# Altium PCB pipe_corner_pcb.PcbDoc
Units mm, origin at the board's own origin, x right, y up, seen from the top; angles counter-clockwise.
Board outline 27.9 x 27.15 mm, 2 copper layers (Top Layer, Bottom Layer); 6 components, 7 nets, 24 pads, 0 vias.
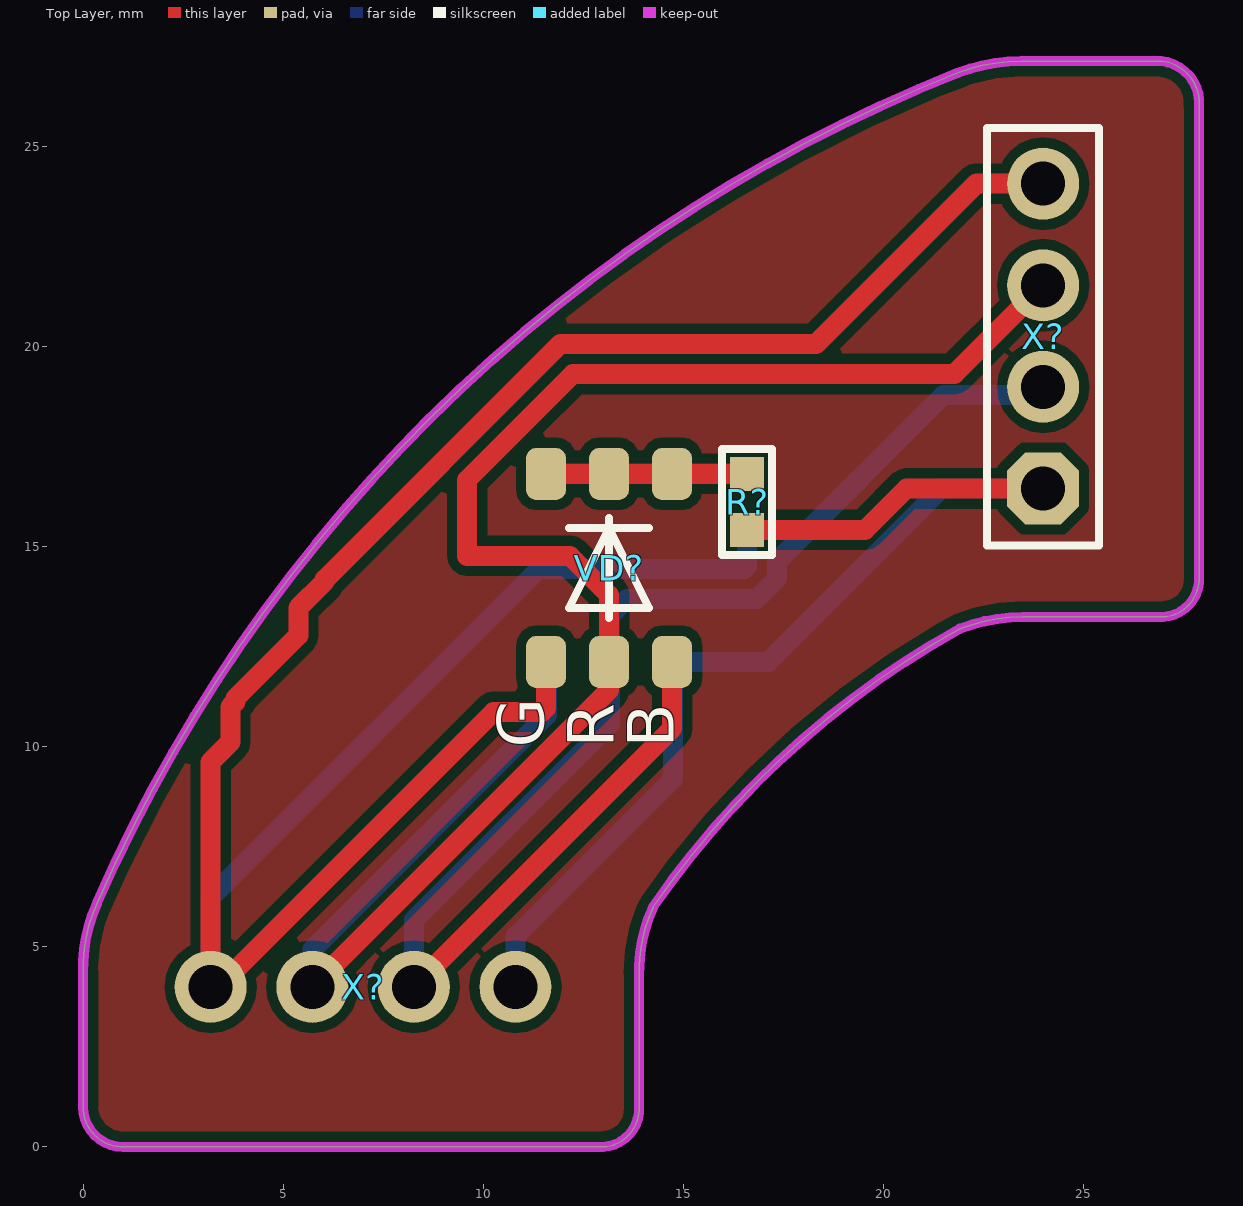
[diagram p0: Top Layer view]
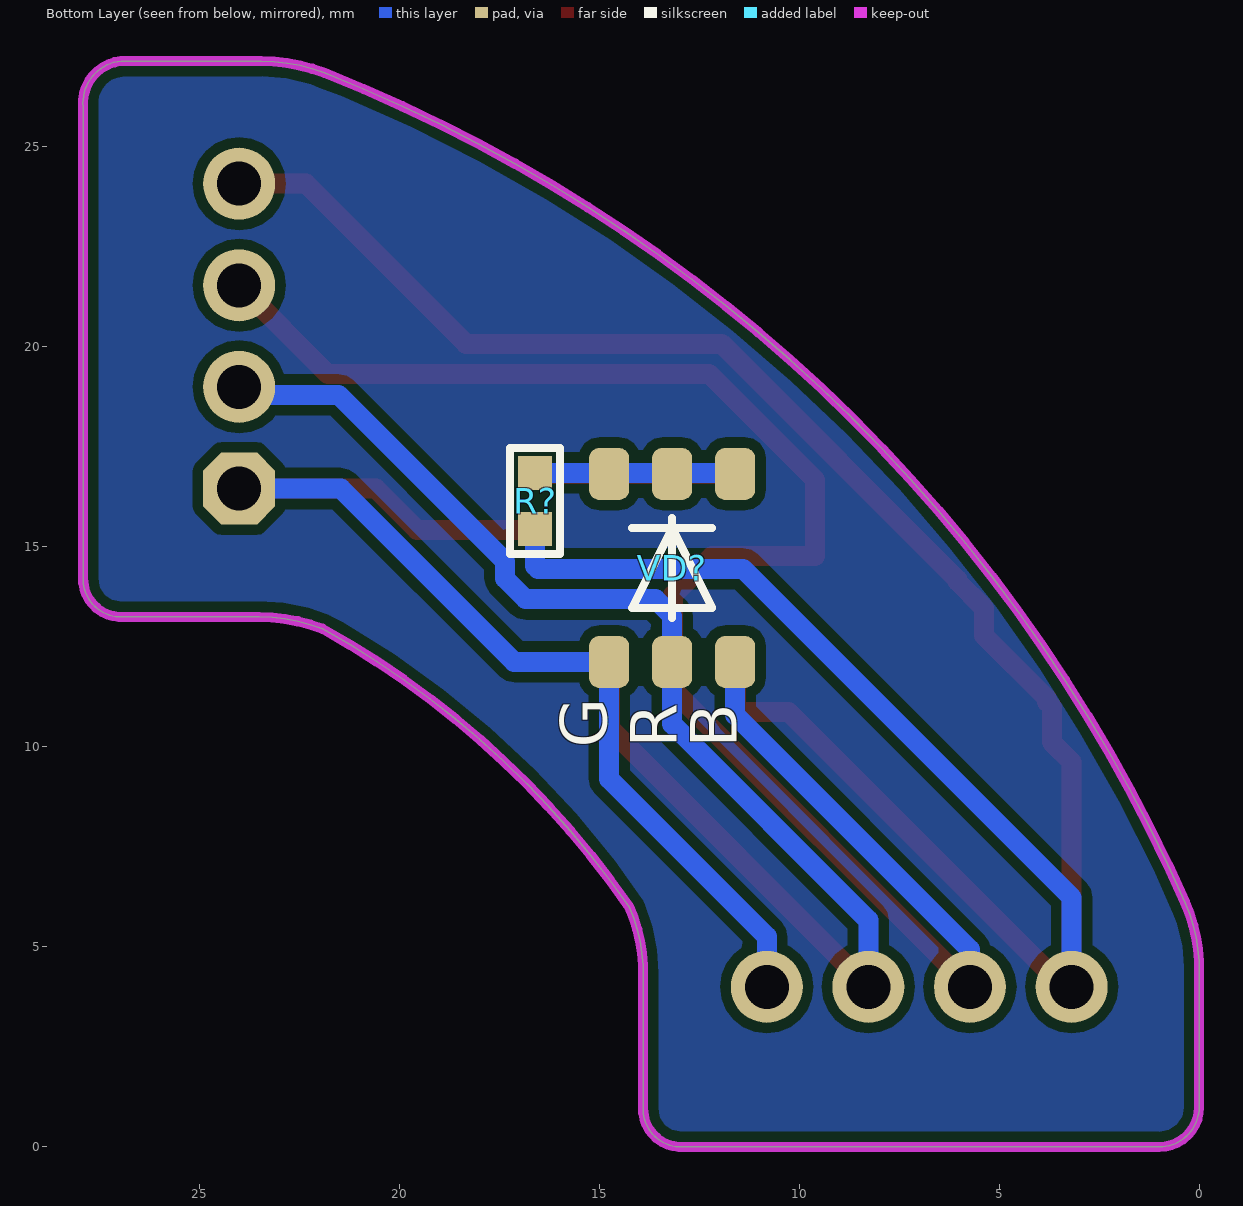
[diagram p1: Bottom Layer view, seen from below]

## Layer stack, top to bottom
Top Solder: solder mask 0.0102, Solder Resist, Dk 3.5
Top Layer: signal copper 0.0356
Dielectric 1: dielectric 0.32, FR-4, Dk 4.8
Bottom Layer: signal copper 0.0356
Bottom Solder: solder mask 0.0102, Solder Resist, Dk 3.5

## Board outline
0,1 ccw(c1,1) 1,0 13,0 ccw(c12.95,0.95) 13.9,1 13.9,4.25 cw(c17.95,4.35) 14.25,6 cw(c32.99,-6.958) 21.917,12.954 cw(c23.514,8.792) 23.5,13.25 27,13.25 ccw(c26.95,14.2) 27.9,14.25 27.9,26 ccw(c26.852,26.098) 26.95,27.147 23.45,27.147 ccw(c23.464,22.689) 21.867,26.851 ccw(c36.368,-9.717) 0.35,6.1 ccw(c4.05,4.45) 0,4.35

## Design rules (kind name [scope] priority, off if disabled: settings)
Clearance [All] p1: gap=0.254 ignorepadtopadclearanceinfootprint=FALSE except(0: Arc-Hole Track-Hole SMDPad-Hole THPad-Hole Via-Hole Fill-Hole Poly-Hole Region-Hole Text-Hole)
PolygonConnect [All] p1: connectstyle=Relief reliefconductorwidth=0.254 reliefentries=4 polygonreliefangle="90 Angle" airgapwidth=0.254
RoutingVias [All] p1: holewidth=0.711 width=1.27 viastyle="Through Hole" minholewidth=0.711 minwidth=1.27 maxholewidth=0.711 maxwidth=1.27
SolderMaskExpansion [All] p1: expansion=0.102
Width [All] p1: maxlimit=2 minlimit=0.254 preferedwidth=0.5
30 further rules are at their usual default settings.

## Classes and differential pairs
component class pipe_corner_schematic: J1 R? VD? X?

## Components (designator, comment, footprint, x,y, rotation, side; value= is the part's Value field where it differs from the comment)
R? "Resistor film, 100R, ±5%, 0603, 0.1W, -55...+125°C" "RES: 0603" 16.6,16.15 r270 bottom value=100R
R? "Resistor film, 100R, ±5%, 0603, 0.1W, -55...+125°C" "RES: 0603" 16.6,16.125 r270 top value=100R
VD? "VD?" RGB 13.15,14.475 r90 top
VD? "VD?" RGB 13.175,14.475 r90 bottom
X? "Connector, 4pin, 2.54mm, 500VAC, 3A" "CON: PBS-4 R" 24,20.27 r90 top
X? "Connector, 4pin, 2.54mm, 500VAC, 3A" "4PLS RIGHT ANGLE 2" 7,4 r180 top

## Footprints (in the part's own frame and the unit in brackets; to place one, negate y for a bottom-side part, rotate by r counter-clockwise, add the part's x,y. Pads: shape width x height; smd on the part's side, far side on the other; paste and mask are expansions set on the pad)
"4PLS RIGHT ANGLE 2" [mm]
  round 1.8 hole 1.1: 1(-3.81,0) 2(-1.27,0) 3(1.27,0) 4(3.81,0)
  body extent -5.04,-0.32 5.14,10.04, height 2.57
"CON: PBS-4 R" [mm] "PBS-5"
  oct 1.8x1.8 hole 1.1: 1(-3.81,0)
  round 1.8 hole 1.1: 2(-1.27,0) 3(1.27,0) 4(3.81,0)
  silkscreen extent -5.23,-1.4 5.2,1.4, body extent -5.08,-10.2 5.08,0, height 2.54
"RES: 0603" [mm]
  rect 0.85x0.85 smd: 1(-0.7,0) 2(0.7,0)
  silkscreen extent -1.33,-0.63 1.33,0.63, body extent -0.8,-0.4 0.8,0.4, height 0.44
RGB [mm]
  rrect50% 1.3x1 smd: 1(2.35,1.575) 2(2.35,0) 3(2.35,-1.575) 4(-2.35,1.575) 5(-2.35,0) 6(-2.35,-1.575)
  silkscreen extent -1.25,-1 1.25,1, body extent -1.8,-1.75 1.8,1.75, height 2.01

## Part data
R? R?: library part Resistor_0603, Manufacturer=Yageo, Package=0603, PartNumber=RC0603JR-07100RL, Power=0.1W, Temperature=-55...+125°C, Tolerance=±5%, TypeResistor="Resistor film", HelpURL=https://www.digikey.com/product-detail/en/yageo/RC0603JR-07100RL/311-100GRCT-ND/729644, ValueManufacturerPartNumber="Resistor film, 100R, ±5%, 0603, 0.1W, -55...+125°C"
VD? VD?: library part RGB
X?: library part PBS-4, CurrentMax=3A, Manufacturer=Connfly, VoltageMax=500VAC, CommentText=Output, HelpURL=https://www.chipdip.ru/product/pbs-4, Multichannel=4pin, PartNumber=PBS-4, Pitch=2.54mm, TypeConnector=Connector, ValueManufacturerPartNumber="Connector, 4pin, 2.54mm, 500VAC, 3A"
X?: library part PLS-4, CurrentMax=3A, Manufacturer=Connfly, VoltageMax=500VAC, CommentText=Input, HelpURL=https://www.chipdip.ru/product/pls-4, Multichannel=4pin, PartNumber=PLS-4, Pitch=2.54mm, TypeConnector=Connector, ValueManufacturerPartNumber="Connector, 4pin, 2.54mm, 500VAC, 3A"

## Nets (pads, with @x,y where several pads share a name; then routed paths per layer and width w, separated by ;. In a path a pad name is that pad's centre, name@x,y a point inside that pad or via, vN(x,y) a via of type N, cw(c..) or ccw(c..) an arc to the next point about the centre after c; other vN are vias at no path point)
gnd: R?.2@16.6,15.425 VD?.4@14.75,12.125 X?.1 | length 28.6
  Top Layer w0.5: R?.2@16.6,15.425 19.55,15.425 20.585,16.46 X?.1@24,16.46
  Bottom Layer w0.5: X?.1@10.81,4 10.81,5.26 14.75,9.2 14.75,12.125 17.125,12.125 21.46,16.46 X?.1@24,16.46
NetR?_1: R?.1@16.6,16.825 VD?.1@11.575,16.825 VD?.2@13.15,16.825 VD?.3@14.725,16.825 | length 5
  Top Layer w0.5: VD?.1@11.575,16.825 13.15,16.825 14.725,16.825 R?.1@16.6,16.825
NetVD?_2: 
NetVD?_4: R?.2@16.6,15.45 VD?.4@11.575,12.125 X?.4 | length 65.9
  Top Layer w0.5: VD?.4@11.575,12.125 11.575,10.975 11.475,10.875 10.263,10.875 3.388,4 3.19,4 3.19,9.627 3.683,10.119 3.683,11.001 3.806,11.125 3.806,11.209 5.382,12.785 5.382,13.479 6.04,14.136 6.04,14.181 11.936,20.077 18.327,20.077 22.33,24.08 X?.4@24,24.08
  Bottom Layer w0.5: X?.4@3.19,4 3.19,6.24 11.4,14.45 16.529,14.45 16.6,14.521 R?.2@16.6,15.45
NetVD?_5: VD?.5@13.15,12.125 VD?.6@11.6,12.125 X?.3 | length 45.7
  Top Layer w0.5: X?.3@5.73,4 13.15,11.42 13.15,12.125 13.15,13.8 12.175,14.775 9.6,14.775 9.6,16.675 12.248,19.323 21.783,19.323 X?.3@24,21.54
  Bottom Layer w0.5: X?.3@5.73,4 5.73,4.93 11.6,10.8 VD?.6@11.6,12.125
NetVD?_6: VD?.5@13.175,12.125 VD?.6@14.725,12.125 X?.2 | length 35.6
  Top Layer w0.5: X?.2@8.27,4 14.725,10.455 VD?.6@14.725,12.125
  Bottom Layer w0.5: X?.2@8.27,4 8.27,5.67 13.175,10.575 13.175,12.125 13.175,13.275 13.596,13.696 16.841,13.696 17.354,14.209 17.354,14.641 21.513,18.8 23.8,18.8 X?.2@24,19
track: R?.1@16.6,16.85 VD?.1@14.75,16.825 VD?.2@13.175,16.825 VD?.3@11.6,16.825 | length 5
  Bottom Layer w0.5: VD?.3@11.6,16.825 11.625,16.85 R?.1@16.6,16.85

## Polygon pours and split planes (outlines as drawn)
no net on Top Layer "Top Layer-No Net" (solid, pour order 0): 0,1 ccw(c1,1) 1,0 13,0 ccw(c12.95,0.95) 13.9,1 13.9,4.25 cw(c17.95,4.35) 14.25,6 cw(c32.99,-6.958) 21.917,12.954 cw(c23.514,8.792) 23.5,13.25 27,13.25 ccw(c26.95,14.2) 27.9,14.25 27.9,26 ccw(c26.852,26.098) 26.95,27.147 23.45,27.147 ccw(c23.464,22.689) 21.867,26.851 ccw(c36.368,-9.717) 0.35,6.1 ccw(c4.05,4.45) 0,4.35
no net on Bottom Layer "Top Layer-No Net1" (solid, pour order 1): 0,1 ccw(c1,1) 1,0 13,0 ccw(c12.95,0.95) 13.9,1 13.9,4.25 cw(c17.95,4.35) 14.25,6 cw(c32.99,-6.958) 21.917,12.954 cw(c23.514,8.792) 23.5,13.25 27,13.25 ccw(c26.95,14.2) 27.9,14.25 27.9,26 ccw(c26.852,26.098) 26.95,27.147 23.45,27.147 ccw(c23.464,22.689) 21.867,26.851 ccw(c36.368,-9.717) 0.35,6.1 ccw(c4.05,4.45) 0,4.35

## Keep-outs
Keep-Out Layer:
  the board outline again, w0.254

## Text inside footprints (layer, text, board x,y; h text height)
VD?: Top Overlay "G" at 11.9,9.975 h2 r90; Top Overlay "R" at 13.65,9.975 h2 r90; Top Overlay "B" at 15.15,9.975 h2 r90
VD?: Bottom Overlay "G" at 14.425,9.975 h2 r270; Bottom Overlay "R" at 12.675,9.975 h2 r270; Bottom Overlay "B" at 11.175,9.975 h2 r270